# EAGLE board InkTime (EAGLE 9.7.0), part 1 of 2
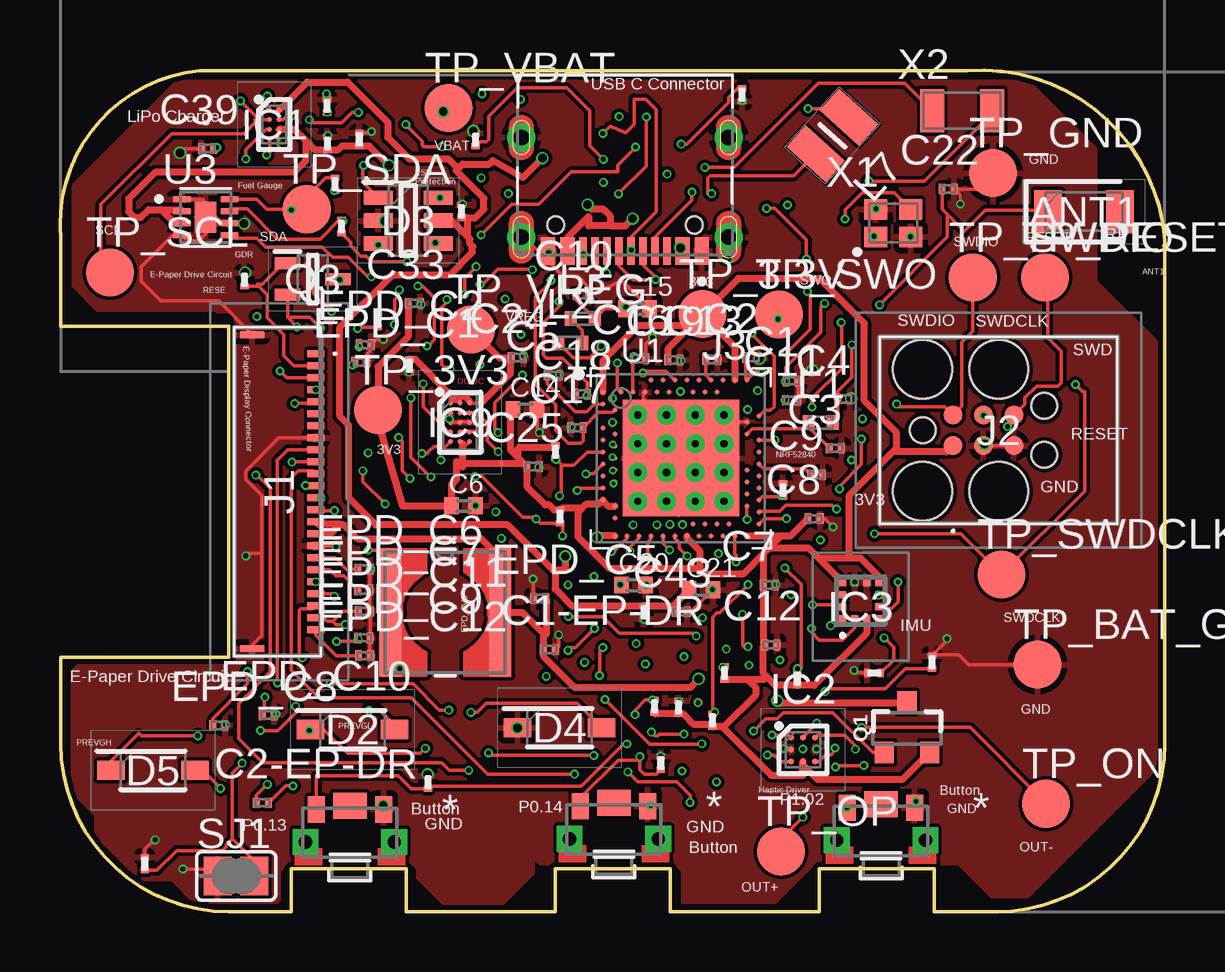
[diagram p0: board, top side]
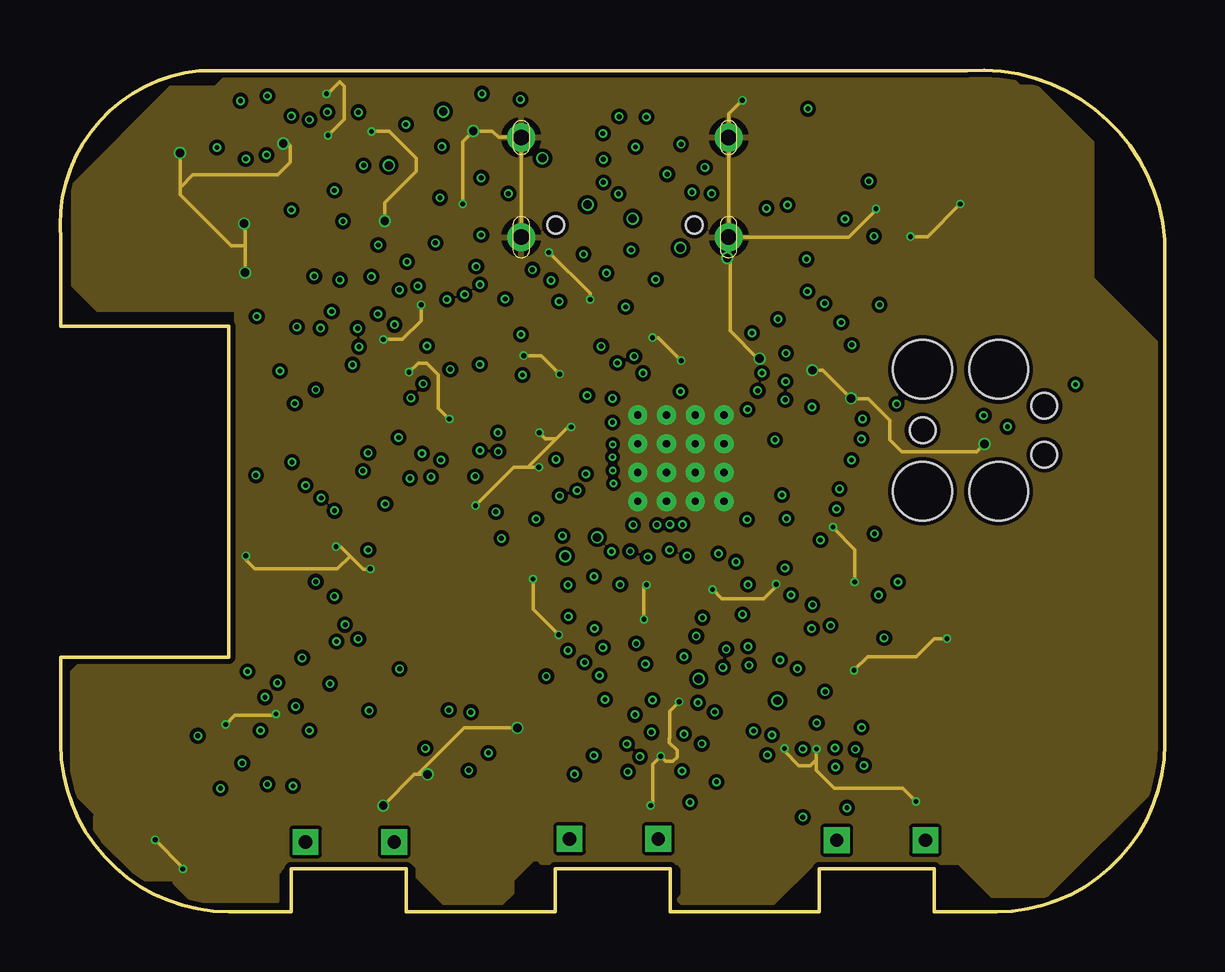
[diagram p1: board, inner layer Route2]
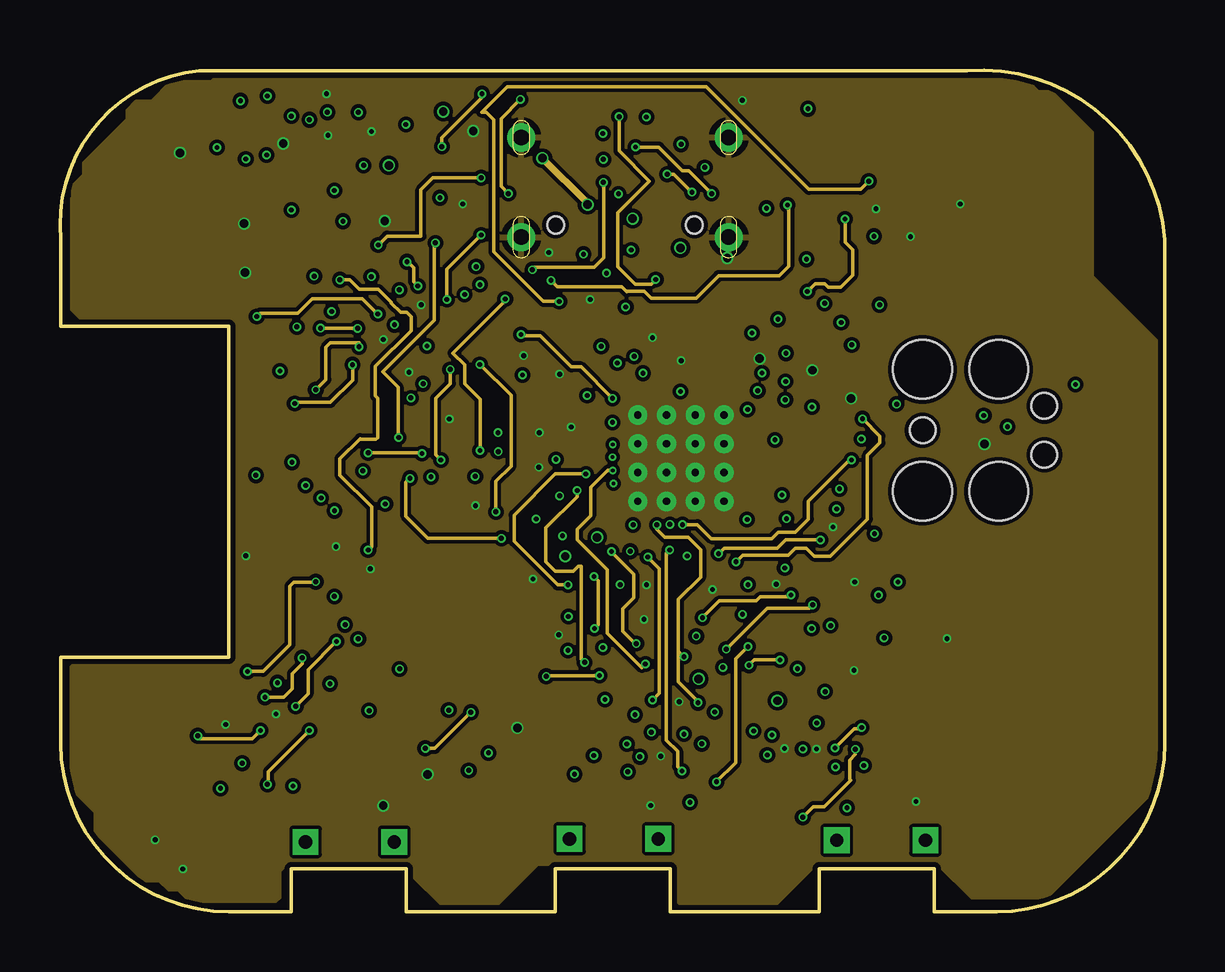
[diagram p2: board, inner layer Route15]
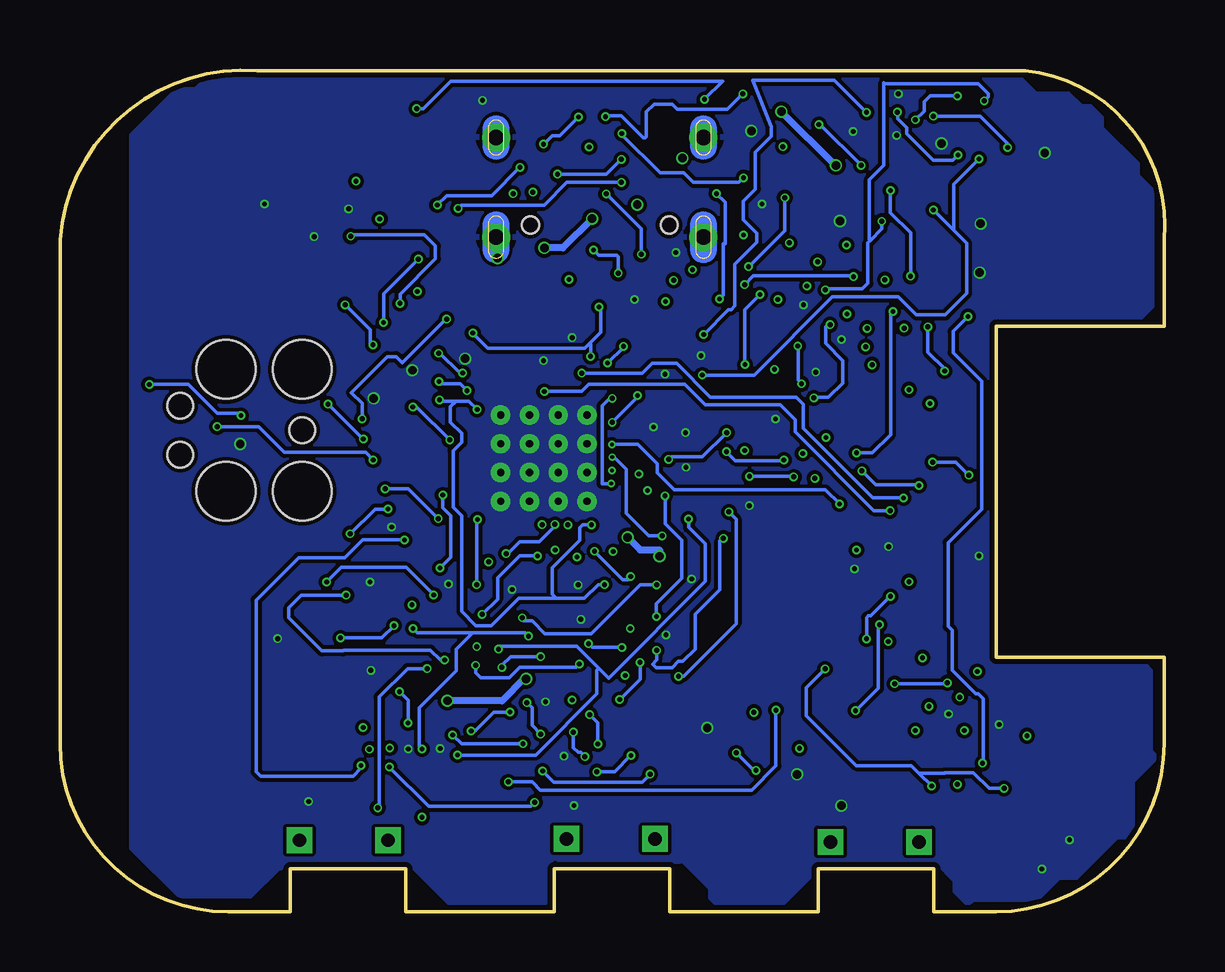
[diagram p3: board, bottom side, seen from below]

Size 46.03 x 35.06 mm. Coordinates in mm from the lower left corner, seen from the top.
Outline: 39.03,0 36.43,0 36.43,1.8 31.63,1.8 31.63,0 25.43,0 25.43,1.8 20.63,1.8 20.63,0 14.43,0 14.43,1.8 9.63,1.8 9.63,0 7.03,0 arc-90 0.03,7 0.03,10.6 7.03,10.6 7.03,24.4 0.03,24.4 0.03,28 arc-90 5.81,35.04 37.81,35.04 arc-90 46.03,28 46.03,7 arc-90 39.03,0
Copper layers (1*16): Top 0.035mm / dielectric 1.6mm / Bottom 0.035mm
Design rules "jlcpcb-2layers.dru *": minimum track width 0.15mm, minimum drill 0.15mm, track to track 0.15mm, track to pad 0.15mm, pad to pad 0.15mm, via to via 0.15mm, smd to smd 0.15mm, copper to edge 0.2mm, drill to drill 6mil, minimum pad ring 10mil, minimum via ring 3mil, stop-mask expansion 4mil, vias tented up to drill 999mm, thermal gap 10mil

## Footprints (pad centres in the part's own frame; a part is rotated, then mirrored left to right if it is on the bottom)
2450AT18B100E_ANTC3216X140N = smd 1.15 x 1.8: 1 -1.5,0; 2 1.5,0
NORDIC_NRF_3_RESC0201_L = smd 0.28 x 0.43: 1 -0.255,0; 2 0.255,0
PERFECT_0402_0402 = smd 0.6 x 0.7: 1 -0.5,0; 2 0.5,0
GRM011R60J152KE01L_1_0201 = smd 0.35 x 0.25: 1 0,0.275; 2 0,-0.275
ESP32_C6_LIBRARY_5_SOD3716X135N = smd 1.15 x 0.8: 1 -1.75,0; 2 1.75,0
ESP32_C6_LIBRARY_3_SOT95P280X145-6N = smd 1.2 x 0.6: 1 -1.25,0.95; 2 -1.25,0; 3 -1.25,-0.95; 4 1.25,-0.95; 5 1.25,0; 6 1.25,0.95
BQ25180YBGR_BGA8C40P2X4_100X155X50 = smd 0.2 x 0.2: A1 -0.2,0.6; A2 0.2,0.6; B1 -0.2,0.2; B2 0.2,0.2; C1 -0.2,-0.2; C2 0.2,-0.2; D1 -0.2,-0.6; D2 0.2,-0.6
DRV2605YZFR_BGA9C50P3X3_144X144X62 = smd 0.25 x 0.25: A1 -0.5,0.5; A2 0,0.5; A3 0.5,0.5; B1 -0.5,0; B2 0,0; B3 0.5,0; C1 -0.5,-0.5; C2 0,-0.5; C3 0.5,-0.5
BMA423_BMA423 = smd 0.3 x 0.35: 1 -0.75,-0.775; 2 -0.25,-0.775; 3 0.25,-0.775; 4 0.75,-0.775; 7 0.75,0.775; 8 0.25,0.775; 9 -0.25,0.775; 10 -0.75,0.775 | smd 0.35 x 0.3: 5 0.775,-0.25; 6 0.775,0.25; 11 -0.775,0.25; 12 -0.775,-0.25
RT6160AWSC_BGA15C40P3X5_140X230X60 = smd 0.216 x 0.216: A1 -0.4,0.8; A2 0,0.8; A3 0.4,0.8; B1 -0.4,0.4; B2 0,0.4; B3 0.4,0.4; C1 -0.4,0; C2 0,0; C3 0.4,0; D1 -0.4,-0.4; D2 0,-0.4; D3 0.4,-0.4; E1 -0.4,-0.8; E2 0,-0.8; E3 0.4,-0.8
503480-2400_5034802400 = smd 0.3 x 0.7: 1 -5.75,1.525; 2 -5.25,1.525; 3 -4.75,1.525; 4 -4.25,1.525; 5 -3.75,1.525; 6 -3.25,1.525; 7 -2.75,1.525; 8 -2.25,1.525; 9 -1.75,1.525; 10 -1.25,1.525; 11 -0.75,1.525; 12 -0.25,1.525; 13 0.25,1.525; 14 0.75,1.525; 15 1.25,1.525; 16 1.75,1.525; 17 2.25,1.525; 18 2.75,1.525; 19 3.25,1.525; 20 3.75,1.525; 21 4.25,1.525; 22 4.75,1.525; 23 5.25,1.525; 24 5.75,1.525 | smd 0.3 x 1: MP1 -6.54,-1.125; MP2 6.54,-1.125
TC2030-IDC_TC2030IDC = smd 0.783 x 0.783: 1 -0.953,-0.635; 2 -0.953,0.635; 3 0.317,-0.635; 4 0.317,0.635; 5 1.588,-0.635; 6 1.588,0.635 | hole 2.451: -2.223,-2.54; -2.223,2.54; 0.952,-2.54; 0.952,2.54 | hole 1.067: -2.223,0; 2.857,-1.016; 2.857,1.016
KH-TYPE-C-16P_KINGHELM_KH-TYPE-C-16P = smd 0.6 x 1.15: A1_B12 -3.2,4.725; A4_B9 -2.4,4.725; A9_B4 2.4,4.725; A12_B1 3.2,4.725 | smd 0.3 x 1.15: A5 -1.25,4.725; A6 -0.25,4.725; A7 0.25,4.725; A8 1.25,4.725; B5 1.75,4.725; B6 0.75,4.725; B7 -0.75,4.725; B8 -1.75,4.725 | drill 0.65 pad 1.05: SH1 -4.32,0; SH2 4.32,0; SH3 -4.32,4.15; SH4 4.32,4.15 | hole 0.7: -2.89,3.65; 2.89,3.65
NORDIC_NRF_2_RESC0402_L = smd 0.5 x 0.6: 1 -0.5,0; 2 0.5,0
ESP32_C6_LIBRARY_2_IND_4828-WE-TPC_WRE = smd 0.9 x 5.3: 1 -2.286,0; 2 2.286,0
MLP2016SR47MT0S1_INDC2016X100N = smd 1.2 x 2.2: 1 -1.028,0; 2 1.028,0
ESP32_C6_LIBRARY_4_ESP32_C6_LIBRARY_4_ESP32_C6_LIBRARY_4_ESP32_C6_LIBRARY_4_ESP32_WROVER_SPARKFUN-DISCRETESEMI_SOT23-3 = smd 0.8 x 0.9: 1 -0.95,-1; 2 0.95,-1; 3 0,1.1
ESP32_C6_LIBRARY_6_SOT65P210X110-3N = smd 1.05 x 0.5: 1 -1.05,0.65; 2 -1.05,-0.65; 3 1.05,0
CPF0201D7K68C1_0201 = smd 0.35 x 0.25: 1 0,0.275; 2 0,-0.275
ESP32_C6_LIBRARY_7_JUMPER_SJ = smd 1.168 x 1.6: 1 -0.762,0; 2 0.762,0
2025-10-22_07-23-44_LIBRARY_SW_EVP-AKE31A_PAN = smd 0.711 x 1.092: 1 -1.4,-0.972; 2 1.4,-0.972 | drill 0.559 pad 0.914 square: 3 -1.848,0.381; 4 1.848,0.381 | smd 1.397 x 1.092: 5 0,-1.124
HECTOR_WATCH_1_TP20R = smd 2 x 2: TP 0,0
NORDIC_NRF_4_AQFN50P700X700X85_HS-74N = smd 4.85 x 4.85: P$74 0,0 | drill 0.3 pad 0.6: P$75 -1.8,1.8; P$76 -0.6,1.8; P$77 0.6,1.8; P$78 1.8,1.8; P$79 -1.8,0.6; P$80 -0.6,0.6; P$81 0.6,0.6; P$82 1.8,0.6; P$83 -1.8,-0.6; P$84 -0.6,-0.6; P$85 0.6,-0.6; P$86 1.8,-0.6; P$87 -1.8,-1.8; P$88 -0.6,-1.8; P$89 0.6,-1.8; P$90 1.8,-1.8 | smd 0.2 x 0.2: P$A8 -1.25,3.25; P$A10 -0.75,3.25; P$A12 -0.25,3.25; P$A14 0.25,3.25; P$A16 0.75,3.25; P$A18 1.25,3.25; P$A20 1.75,3.25; P$A22 2.25,3.25; P$A23 2.75,3.25; P$AA24 3.25,-2.25; P$AB2 -2.75,-2.5; P$AC5 -2,-2.75; P$AC9 -1,-2.75; P$AC11 -0.5,-2.75; P$AC13 0,-2.75; P$AC15 0.5,-2.75; P$AC17 1,-2.75; P$AC19 1.5,-2.75; P$AC21 2,-2.75; P$AC24 3.25,-2.75; P$AD2 -2.75,-3.25; P$AD4 -2.25,-3.25; P$AD6 -1.75,-3.25; P$AD8 -1.25,-3.25; P$AD10 -0.75,-3.25; P$AD12 -0.25,-3.25; P$AD14 0.25,-3.25; P$AD16 0.75,-3.25; P$AD18 1.25,-3.25; P$AD20 1.75,-3.25; P$AD22 2.25,-3.25; P$AD23 2.75,-3.25; P$B1 -3.25,2.75; P$B3 -2.5,2.75; P$B5 -2,2.75; P$B7 -1.5,2.75; P$B9 -1,2.75; P$B11 -0.5,2.75; P$B13 0,2.75; P$B15 0.5,2.75; P$B17 1,2.75; P$B19 1.5,2.75; P$B24 3.25,2.75; P$C1 -3.25,2.25; P$D2 -2.75,2; P$D23 2.75,2; P$E24 3.25,1.75; P$F2 -2.75,1.5; P$F23 2.75,1.5; P$G1 -3.25,1.25; P$H2 -2.75,1; P$H23 2.75,1; P$J1 -3.25,0.75; P$J24 3.25,0.75; P$K2 -2.75,0.5; P$L1 -3.25,0.25; P$L24 3.25,0.25; P$M2 -2.75,0; P$N1 -3.25,-0.25; P$N24 3.25,-0.25; P$P2 -2.75,-0.5; P$P23 2.75,-0.5; P$R1 -3.25,-0.75; P$R24 3.25,-0.75; P$T2 -2.75,-1; P$T23 2.75,-1; P$U1 -3.25,-1.25; P$U24 3.25,-1.25; P$V23 2.75,-1.5; P$W1 -3.25,-1.75; P$W24 3.25,-1.75; P$Y2 -2.75,-2; P$Y23 2.75,-2
ESP32_C6_LIBRARY_SON50P200X200X80-9N = smd 0.76 x 0.27: 1 -0.985,0.75; 2 -0.985,0.25; 3 -0.985,-0.25; 4 -0.985,-0.75; 5 0.985,-0.75; 6 0.985,-0.25; 7 0.985,0.25; 8 0.985,0.75 | smd 0.9 x 1.3: 9 0,0
NORDIC_NRF_BT-XTAL_2016_N = smd 0.95 x 0.85: 1 -0.725,-0.575; 2 0.725,-0.575; 3 0.725,0.575; 4 -0.725,0.575
NORDIC_NRF_1_XTAL_3215_N = smd 1 x 1.8: 1 -1.25,0; 2 1.25,0

## Placement (x,y rotation side)
ANT1  2450AT18B100E_2450AT18B100E  [2450AT18B100E_ANTC3216X140N]  42.67,29.17 0 top
C1  12pF  [NORDIC_NRF_3_RESC0201_L]  30.5,22.12 0 top
C1-EP-DR  10uF  [NORDIC_NRF_3_RESC0201_L]  20.39,10.93 0 top
C2  12pF  [NORDIC_NRF_3_RESC0201_L]  28.82,23.09 0 top
C2-EP-DR  4.7uF/25V  [NORDIC_NRF_3_RESC0201_L]  8.43,4.54 0 top
C3  1pF  [NORDIC_NRF_3_RESC0201_L]  32.31,19.31 0 top
C4  1pF  [NORDIC_NRF_3_RESC0201_L]  32.66,21.36 0 top
C5  100nF  [NORDIC_NRF_3_RESC0201_L]  20.56,22.35 0 top
C6  4.7uF  [PERFECT_0402_0402]  16.82,16.91 0 top
C7  100nF  [NORDIC_NRF_3_RESC0201_L]  29.56,13.61 0 top
C8  100nF  [NORDIC_NRF_3_RESC0201_L]  31.42,16.38 0 top
C9  820pF  [NORDIC_NRF_3_RESC0201_L]  31.52,18.21 0 top
C10  N.C.  [NORDIC_NRF_3_RESC0201_L]  21.76,25.71 0 top
C11  100pF  [NORDIC_NRF_3_RESC0201_L]  30.48,21.31 0 top
C12  100nF  [NORDIC_NRF_3_RESC0201_L]  29.62,11.12 0 top
C13  N.C.  [NORDIC_NRF_3_RESC0201_L]  27.16,23.01 0 top
C14  4.7uF  [PERFECT_0402_0402]  19.38,20.93 0 top
C15  1.0uF  [PERFECT_0402_0402]  24.06,25.13 0 top
C16  47nF  [NORDIC_NRF_3_RESC0201_L]  24.15,23.05 0 top
C17  12pF  [NORDIC_NRF_3_RESC0201_L]  21.54,20.17 0 top
C18  12pF  [NORDIC_NRF_3_RESC0201_L]  21.72,21.57 0 top
C19  100nF  [NORDIC_NRF_3_RESC0201_L]  25.58,22.99 0 top
C20  4.7uF  [PERFECT_0402_0402]  23.9,13.61 0 top
C21  4.7uF  [PERFECT_0402_0402]  26.71,13.41 0 top
C22  N.C.  [NORDIC_NRF_3_RESC0201_L]  37.01,30.11 0 top
C23  0.1uF  [GRM011R60J152KE01L_1_0201]  14.56,22.75 0 top
C24  10uF  [NORDIC_NRF_3_RESC0201_L]  19.06,23.09 0 top
C25  22uF  [NORDIC_NRF_3_RESC0201_L]  19.71,18.55 0 top
C27  0.1uF  [GRM011R60J152KE01L_1_0201]  12.47,32.18 0 top
C29  1uF  [GRM011R60J152KE01L_1_0201]  30.12,17.57 0 top
C30  1uF  [GRM011R60J152KE01L_1_0201]  15.33,5.4 0 top
C31  1uF  [GRM011R60J152KE01L_1_0201]  25.03,6.2 0 top
C32  1uF  [GRM011R60J152KE01L_1_0201]  36.33,10.4 0 top
C33  22uF  [NORDIC_NRF_3_RESC0201_L]  14.76,25.35 0 top
C34  0.1uF  [GRM011R60J152KE01L_1_0201]  25.77,8.52 0 top
C37  10uF  [GRM011R60J152KE01L_1_0201]  11.14,32.01 0 top
C38  1uF  [GRM011R60J152KE01L_1_0201]  16.73,29.19 0 top
C39  10uF  [NORDIC_NRF_3_RESC0201_L]  6.15,31.8 0 top
C42  0.1uF  [GRM011R60J152KE01L_1_0201]  24.33,12.48 0 top
C43  4.7uF  [NORDIC_NRF_3_RESC0201_L]  25.88,12.5 0 top
D2  ESP32_C6_LIBRARY_5_MBR0530  [ESP32_C6_LIBRARY_5_SOD3716X135N]  12.19,7.59 0 top
D3  ESP32_C6_LIBRARY_3_USBLC6-2SC6Y  [ESP32_C6_LIBRARY_3_SOT95P280X145-6N]  14.51,28.8 0 top
D4  ESP32_C6_LIBRARY_5_MBR0530  [ESP32_C6_LIBRARY_5_SOD3716X135N]  20.82,7.67 0 top
D5  ESP32_C6_LIBRARY_5_MBR0530  [ESP32_C6_LIBRARY_5_SOD3716X135N]  3.87,5.89 0 top
EPD_C1  1uF/50V  [NORDIC_NRF_3_RESC0201_L]  12.54,22.9 0 top
EPD_C2  1uF/50V  [NORDIC_NRF_3_RESC0201_L]  12.71,23.63 0 top
EPD_C5  0.1uF/50V  [NORDIC_NRF_3_RESC0201_L]  19.98,13.05 0 top
EPD_C6  1uF/50V  [NORDIC_NRF_3_RESC0201_L]  12.67,14.28 0 top
EPD_C7  1uF/50V  [NORDIC_NRF_3_RESC0201_L]  12.66,13.4 0 top
EPD_C8  1uF/50V  [NORDIC_NRF_3_RESC0201_L]  6.62,7.76 0 top
EPD_C9  1uF/50V  [NORDIC_NRF_3_RESC0201_L]  12.66,11.41 0 top
EPD_C10  1uF/50V  [NORDIC_NRF_3_RESC0201_L]  8.68,8.2 0 top
EPD_C11  1uF/50V  [NORDIC_NRF_3_RESC0201_L]  12.68,12.52 0 top
EPD_C12  1uF/50V  [NORDIC_NRF_3_RESC0201_L]  12.69,10.67 0 top
IC1  BQ25180YBGR_BQ25180YBGRBQ25180YBGR  [BQ25180YBGR_BGA8C40P2X4_100X155X50]  8.93,32.8 0 top
IC2  DRV2605YZFR_DRV2605YZFR  [DRV2605YZFR_BGA9C50P3X3_144X144X62]  30.96,6.75 0 top
IC3  BMA423_BMA423  [BMA423_BMA423]  33.36,12.96 0 top
IC9  RT6160AWSC_RT6160AWSC  [RT6160AWSC_BGA15C40P3X5_140X230X60]  16.67,20.39 0 top
J1  503480-2400_503480-2400  [503480-2400_5034802400]  9.13,17.5 270 top
J2  TC2030-IDC_TC2030-IDC  [TC2030-IDC_TC2030IDC]  38.16,20.06 0 top
J3  KH-TYPE-C-16P_KH-TYPE-C-16P  [KH-TYPE-C-16P_KINGHELM_KH-TYPE-C-16P]  23.54,32.26 180 top
L1  3.9nH  [NORDIC_NRF_2_RESC0402_L]  31.7,20.38 0 top
L2  10uH  [NORDIC_NRF_2_RESC0402_L]  21.26,23.7 0 top
L3  15uH  [NORDIC_NRF_2_RESC0402_L]  21.78,24.71 0 top
L5  68uH  [ESP32_C6_LIBRARY_2_IND_4828-WE-TPC_WRE]  16.05,12.47 0 top
L7  MLP2016SR47MT0S1_FTC252012SR47MBCA  [MLP2016SR47MT0S1_INDC2016X100N]  32.18,32.34 47.7 top
Q1  20V/4.2A/52mΩ/1.4W  [ESP32_C6_LIBRARY_4_ESP32_C6_LIBRARY_4_ESP32_C6_LIBRARY_4_ESP32_C6_LIBRARY_4_ESP32_WROVER_SPARKFUN-DISCRETESEMI_SOT23-3]  35.29,7.64 0 top
Q3  ESP32_C6_LIBRARY_6_SI1308EDL-T1-GE3  [ESP32_C6_LIBRARY_6_SOT65P210X110-3N]  10.53,26.36 0 top
R1_EP_DR  0.47  [CPF0201D7K68C1_0201]  13.24,24.63 0 top
R1_EP_DR1  0.47  [CPF0201D7K68C1_0201]  27.19,7.98 0 top
R1_USB  5K1  [CPF0201D7K68C1_0201]  17.31,32.17 0 top
R2  0  [CPF0201D7K68C1_0201]  11.46,30.31 0 top
R2_EP_DR  10K  [CPF0201D7K68C1_0201]  7.68,26.34 0 top
R2_USB  5K1  [CPF0201D7K68C1_0201]  28.42,34.04 0 top
R3  0  [CPF0201D7K68C1_0201]  33.92,9.95 90 top
R4  0  [CPF0201D7K68C1_0201]  11.73,28.55 0 top
R5  10K  [CPF0201D7K68C1_0201]  24.77,8.56 0 top
R7  10K  [CPF0201D7K68C1_0201]  30.72,9.71 0 top
R8  10K  [CPF0201D7K68C1_0201]  27.68,9.95 0 top
R9  10K  [CPF0201D7K68C1_0201]  11.13,33.57 0 top
R17  3K3  [CPF0201D7K68C1_0201]  20.83,16.47 0 top
R18  3K3  [CPF0201D7K68C1_0201]  20.64,19.16 0 top
R_TYPE_SEL  2.2  [CPF0201D7K68C1_0201]  3.53,2 0 top
SJ1  [ESP32_C6_LIBRARY_7_JUMPER_SJ]  7.34,1.49 0 top
SW_DN  2025-10-22_07-23-44_LIBRARY_EVP-AKE31ASW_EVP-AKE31A_PAN  [2025-10-22_07-23-44_LIBRARY_SW_EVP-AKE31A_PAN]  34.21,3.36 180 top
SW_ENT  2025-10-22_07-23-44_LIBRARY_EVP-AKE31ASW_EVP-AKE31A_PAN  [2025-10-22_07-23-44_LIBRARY_SW_EVP-AKE31A_PAN]  23.08,3.42 180 top
SW_UP  2025-10-22_07-23-44_LIBRARY_EVP-AKE31ASW_EVP-AKE31A_PAN  [2025-10-22_07-23-44_LIBRARY_SW_EVP-AKE31A_PAN]  12.08,3.29 180 top
TP_3.3V  HECTOR_WATCH_1_TPTP20R  [HECTOR_WATCH_1_TP20R]  26.77,24.9 0 top
TP_3V3  HECTOR_WATCH_1_TPTP20R  [HECTOR_WATCH_1_TP20R]  13.25,20.9 0 top
TP_BAT_GND  HECTOR_WATCH_1_TPTP20R  [HECTOR_WATCH_1_TP20R]  40.73,10.3 0 top
TP_GND  HECTOR_WATCH_1_TPTP20R  [HECTOR_WATCH_1_TP20R]  38.88,30.78 0 top
TP_ON  HECTOR_WATCH_1_TPTP20R  [HECTOR_WATCH_1_TP20R]  41.08,4.5 0 top
TP_OP  HECTOR_WATCH_1_TPTP20R  [HECTOR_WATCH_1_TP20R]  30.04,2.51 0 top
TP_RESET  HECTOR_WATCH_1_TPTP20R  [HECTOR_WATCH_1_TP20R]  41.05,26.43 0 top
TP_SCL  HECTOR_WATCH_1_TPTP20R  [HECTOR_WATCH_1_TP20R]  2.08,26.64 0 top
TP_SDA  HECTOR_WATCH_1_TPTP20R  [HECTOR_WATCH_1_TP20R]  10.28,29.27 0 top
TP_SWDCLK  HECTOR_WATCH_1_TPTP20R  [HECTOR_WATCH_1_TP20R]  39.22,14.06 0 top
TP_SWDIO  HECTOR_WATCH_1_TPTP20R  [HECTOR_WATCH_1_TP20R]  38.03,26.42 0 top
TP_SWO  HECTOR_WATCH_1_TPTP20R  [HECTOR_WATCH_1_TP20R]  29.96,24.89 0 top
TP_VBAT  HECTOR_WATCH_1_TPTP20R  [HECTOR_WATCH_1_TP20R]  16.19,33.49 0 top
TP_VREG  HECTOR_WATCH_1_TPTP20R  [HECTOR_WATCH_1_TP20R]  17.13,24.26 0 top
U1  NORDIC_NRF_4_NRF52840_QF  [NORDIC_NRF_4_AQFN50P700X700X85_HS-74N]  25.87,18.9 0 top
U3  ESP32_C6_LIBRARY_MAX17048G+T10  [ESP32_C6_LIBRARY_SON50P200X200X80-9N]  6.07,28.94 0 top
X1  32MHz  [NORDIC_NRF_BT-XTAL_2016_N]  34.72,28.69 0 top
X2  32.768kHz  [NORDIC_NRF_1_XTAL_3215_N]  37.59,33.38 0 top

## Library data of the parts
ANT1 = InkTime_v5; ARROW_PART_NUMBER: 2450AT18B100E; ARROW_PRICE-STOCK: https://www.arrow.com/en/products/2450at18b100e/johanson-dielectrics?utm_currency=USD&region=nac; DESCRIPTION: Antennas 2.45GHz ANTENNA; HEIGHT: 1.4mm; MANUFACTURER_NAME: JOHANSON TECHNOLOGY; MANUFACTURER_PART_NUMBER: 2450AT18B100E; MOUSER_PART_NUMBER: 609-2450AT18B100E; MOUSER_PRICE-STOCK: https://www.mouser.co.uk/ProductDetail/Johanson-Technology/2450AT18B100E?qs=yCnrNFeXz%252Bh5MFsFIXGZGA%3D%3D
C1 C1-EP-DR C2 C2-EP-DR C3-C25 C27 C29-C34 C37-C39 C42 C43 EPD_C1 EPD_C2 EPD_C5-EPD_C12 IC1 L1-L3 R1_EP_DR R1_EP_DR1 R1_USB R2 R2_EP_DR R2_USB R3-R5 R7-R9 R17 R18 R_TYPE_SEL SJ1 TP_3.3V TP_3V3 TP_BAT_GND TP_GND TP_ON TP_OP TP_RESET TP_SCL TP_SDA TP_SWDCLK TP_SWDIO TP_SWO TP_VBAT TP_VREG U1 X1 X2 = InkTime_v5
D2 D4 D5 = InkTime_v5; AVAILABILITY: In Stock; CHECK_PRICES: https://www.snapeda.com/parts/MBR0530/Onsemi/view-part/?ref=eda; DESCRIPTION: Diode Schottky 30 V 500mA Surface Mount SOD-123; MF: ON Semiconductor; MP: MBR0530; PACKAGE: SOD-123-2 ON Semiconductor; PRICE: None; PURCHASE-URL: https://www.snapeda.com/api/url_track_click_mouser/?unipart_id=179458&manufacturer=ON Semiconductor&part_name=MBR0530&search_term=None; SNAPEDA_LINK: https://www.snapeda.com/parts/MBR0530/Onsemi/view-part/?ref=snap
D3 = InkTime_v5; AVAILABILITY: In Stock; CHECK_PRICES: https://www.snapeda.com/parts/USBLC6-2SC6Y/STMicroelectronics/view-part/?ref=eda; DESCRIPTION: 17V Clamp 5A (8/20µs) Ipp Tvs Diode Surface Mount SOT-23-6; MF: STMicroelectronics; MP: USBLC6-2SC6Y; PACKAGE: SOT-23-6 STMicroelectronics; PRICE: None; SNAPEDA_LINK: https://www.snapeda.com/parts/USBLC6-2SC6Y/STMicroelectronics/view-part/?ref=snap
IC2 = InkTime_v5; ARROW_PART_NUMBER: DRV2605YZFR; ARROW_PRICE-STOCK: https://www.arrow.com/en/products/drv2605yzfr/texas-instruments?region=nac; DESCRIPTION: Haptic Driver for ERM/LRA with Built-In Library and Smart Loop Architecture; HEIGHT: 0.625mm; MANUFACTURER_NAME: Texas Instruments; MANUFACTURER_PART_NUMBER: DRV2605YZFR
IC3 = InkTime_v5; ARROW_PART_NUMBER: BMA423; ARROW_PRICE-STOCK: https://www.arrow.com/en/products/bma423/bosch; DESCRIPTION: Accelerometers Triaxial low-g 12bit Acceleration Sensor; HEIGHT: 1mm; MANUFACTURER_NAME: BOSCH; MANUFACTURER_PART_NUMBER: BMA423; MOUSER_PART_NUMBER: 262-BMA423; MOUSER_PRICE-STOCK: https://www.mouser.co.uk/ProductDetail/Bosch-Sensortec/BMA423?qs=HXFqYaX1Q2xC%252BSgeGoX3mg%3D%3D
IC9 = InkTime_v5; DESCRIPTION: Buck-Boost Regulator Positive Output Step-Up/Step-Down I2C DC-DC Controller IC 15-WL-CSP (BSC) (1.4x2.3); HEIGHT: 0.6mm; MANUFACTURER_NAME: RICHTEK; MANUFACTURER_PART_NUMBER: RT6160AWSC; MOUSER_PART_NUMBER: 835-RT6160AWSC; MOUSER_PRICE-STOCK: https://www.mouser.co.uk/ProductDetail/Richtek/RT6160AWSC?qs=amGC7iS6iy%2FLd9PSoixZXQ%3D%3D
J1 = InkTime_v5; DESCRIPTION: FFC & FPC Connectors 0.5mm FPC RA SMT Dual Contact 24Ckt; HEIGHT: 1.87mm; MANUFACTURER_NAME: Molex; MANUFACTURER_PART_NUMBER: 503480-2400; MOUSER_PART_NUMBER: 538-503480-2400; MOUSER_PRICE-STOCK: https://www.mouser.co.uk/ProductDetail/Molex/503480-2400?qs=OAhjpuo3Vu7efIoxFh9AOw%3D%3D
J2 = InkTime_v5; DESCRIPTION: CABLE ADAPTER 6 POS; HEIGHT: 19mm; MANUFACTURER_NAME: Tag Connect; MANUFACTURER_PART_NUMBER: TC2030-IDC
J3 = InkTime_v5; AVAILABILITY: Not in stock; CHECK_PRICES: https://www.snapeda.com/parts/KH-TYPE-C-16P/Kinghelm/view-part/?ref=eda; MF: kinghelm; MP: KH-TYPE-C-16P; PACKAGE: None; PRICE: None; SNAPEDA_LINK: https://www.snapeda.com/parts/KH-TYPE-C-16P/Kinghelm/view-part/?ref=snap
L5 = InkTime_v5; COPYRIGHT: Copyright (C) 2024 Ultra Librarian. All rights reserved.; MANUFACTURER_PART_NUMBER: 744043680; MFR_NAME: Wurth Electronics
L7 = InkTime_v5; DESCRIPTION: SMD / SMT Inductors (Coils), L=0.47?H, L x W x T :; HEIGHT: 1mm; JLCPCB: https://jlcpcb.com/partdetail/6763488-FTC252012SR47MBCA/C5832368; MANUFACTURER_NAME: TDK; MANUFACTURER_PART_NUMBER: FTC252012SR47MBCA
Q1 = InkTime_v5; PROD_ID: TRAN-14388
Q3 = InkTime_v5; AVAILABILITY: In Stock; CHECK_PRICES: https://www.snapeda.com/parts/SI1308EDL-T1-GE3/Vishay+Siliconix/view-part/?ref=eda; DESCRIPTION: Si1308EDL-T1-GE3 N-channel MOSFET Transistor, 1.5 A, 30 V, 3-Pin SC-70 | Siliconix / Vishay SI1308EDL-T1-GE3; MF: Vishay Siliconix; MP: SI1308EDL-T1-GE3; PACKAGE: SOT-323 Vishay Semiconductor; PRICE: None; PURCHASE-URL: https://www.snapeda.com/api/url_track_click_mouser/?unipart_id=274603&manufacturer=Vishay Siliconix&part_name=SI1308EDL-T1-GE3&search_term=None; SNAPEDA_LINK: https://www.snapeda.com/parts/SI1308EDL-T1-GE3/Vishay+Siliconix/view-part/?ref=snap
SW_DN SW_ENT SW_UP = InkTime_v5; COPYRIGHT: Copyright (C) 2025 Ultra Librarian. All rights reserved.; DIGI-KEY_PART_NUMBER_1: P123437TR-ND; DIGI-KEY_PART_NUMBER_2: P123437CT-ND; DIGI-KEY_PART_NUMBER_3: P123437DKR-ND; MANUFACTURER_NAME: Panasonic; MANUFACTURER_PART_NUMBER: EVP-AKE31A
U3 = InkTime_v5; AVAILABILITY: In Stock; CHECK_PRICES: https://www.snapeda.com/parts/MAX17048G+T10/Analog+Devices/view-part/?ref=eda; DESCRIPTION: 3µA 1-Cell/2-Cell Fuel Gauge with ModelGauge; MF: Analog Devices; MP: MAX17048G+T10; PACKAGE: TDFN-8 Maxim; PRICE: None; PURCHASE-URL: https://www.snapeda.com/api/url_track_click_mouser/?unipart_id=329239&manufacturer=Analog Devices&part_name=MAX17048G+T10&search_term=None; SNAPEDA_LINK: https://www.snapeda.com/parts/MAX17048G+T10/Analog+Devices/view-part/?ref=snap

## Nets
3V3: C6.1 C7.1 C8.1 C12.1 C14.1 C19.1 C25.1 C33.1 C34.2 IC2.C2 IC3.3 IC3.7 IC3.10 IC9.E2 IC9.E3 J2.1 Q1.2 R1_EP_DR1.2 R5.2 R7.2 R8.2 R17.1 R18.1 TP_3.3V.TP TP_3V3.TP U1.P$A22 U1.P$AD14 U1.P$AD23 U1.P$B1 U1.P$W1 U1.P$Y2
ALERT [New Class]: U1.P$J24 U3.5
D+ [New Class]: D3.4 U1.P$AD6
D- [New Class]: D3.6 U1.P$AD4
DEC1 [New Class]: C5.1 U1.P$C1
DEC3 [New Class]: C11.1 C20.1 U1.P$AC5 U1.P$D23
DEC4_6 [New Class]: C10.1 C15.1 C16.1 L3.2 U1.P$B5 U1.P$E24
DN [New Class]: D3.1 J3.A7 J3.B7
DP [New Class]: D3.3 J3.A6 J3.B6
EPD_3V3: C1-EP-DR.1 EPD_C5.2 J1.15 J1.16 L5.2 Q1.3
EPD_BUSY [New Class]: J1.9 U1.P$AD12
EPD_CS [New Class]: J1.12 U1.P$K2
EPD_DC [New Class]: J1.11 U1.P$AD10
EPD_RST [New Class]: J1.10 U1.P$AC11
GDR [New Class]: J1.2 Q3.1 R2_EP_DR.2
GND [New Class]: C1-EP-DR.2 C1.2 C2.2 C3.2 C4.2 C5.2 C6.2 C7.2 C8.2 C9.2 C10.2 C11.2 C12.2 C13.2 C14.2 C15.2 C16.2 C17.1 C18.1 C19.2 C20.2 C21.2 C22.2 C23.2 C24.2 C25.2 C27.1 C29.1 C30.1 C31.1 C32.1 C33.2 C34.1 C37.1 C38.1 C39.1 C42.2 C43.2 D3.2 D4.1 EPD_C1.2 EPD_C2.2 EPD_C5.1 EPD_C6.2 EPD_C7.2 EPD_C8.2 EPD_C9.2 EPD_C10.2 EPD_C11.2 EPD_C12.2 IC1.D2 IC2.B1 IC2.B3 IC3.8 IC3.9 IC9.B1 IC9.C1 IC9.C2 IC9.C3 J1.8 J1.17 J1.MP1 J1.MP2 J2.3 J2.5 J3.A1_B12 J3.A12_B1 J3.SH1 J3.SH2 J3.SH3 J3.SH4 R1_USB.1 R2_EP_DR.1 R2_USB.2 R3.1 R9.1 R_TYPE_SEL.1 SJ1.1 SW_DN.1 SW_ENT.1 SW_UP.1 TP_BAT_GND.TP TP_GND.TP U1.P$74 U1.P$75 U1.P$76 U1.P$77 U1.P$78 U1.P$79 U1.P$80 U1.P$81 U1.P$82 U1.P$83 U1.P$84 U1.P$85 U1.P$86 U1.P$87 U1.P$88 U1.P$89 U1.P$90 U1.P$B7 U1.P$F23 U3.1 U3.4 U3.6 U3.9 X1.2 X1.4
HAPTIC_EN [New Class]: IC2.A1 U1.P$U1
IMU_INT1 [New Class]: IC3.5 U1.P$N1
IMU_INT2 [New Class]: IC3.6 U1.P$P2
LX1 [New Class]: IC9.B2 IC9.B3 L7.1
LX2 [New Class]: IC9.D2 IC9.D3 L7.2
MOSI [New Class]: J1.14 U1.P$B13
N$1 [New Class]: C9.1 U1.P$N24
N$2 [New Class]: C3.1 L1.1 U1.P$H23
N$3 [New Class]: L2.2 L3.1
N$4 [New Class]: C13.1 U1.P$A18
N$5 [New Class]: L2.1 U1.P$B3
N$6 [New Class]: C1.1 U1.P$B24 X1.1
N$7 [New Class]: C2.1 U1.P$A23 X1.3
N$8 [New Class]: C39.2 IC1.B2
N$9 [New Class]: IC1.D1 R9.2
N$11 [New Class]: IC9.D1 R4.2
N$12 [New Class]: IC9.E1 R2.2
N$13 [New Class]: IC3.1 R3.2
N$14 [New Class]: C2-EP-DR.1 D2.1 D4.2
N$15 [New Class]: C2-EP-DR.2 D5.2 L5.1 Q3.3
N$16 [New Class]: R1_EP_DR.1 R_TYPE_SEL.2 SJ1.2
N$17 [New Class]: EPD_C2.1 J1.4
N$18 [New Class]: EPD_C1.1 J1.5
N$19 [New Class]: EPD_C6.1 J1.18
N$20 [New Class]: EPD_C7.1 J1.19
N$21 [New Class]: EPD_C8.1 J1.20
N$22 [New Class]: J3.A5 R1_USB.2
N$23 [New Class]: EPD_C10.1 J1.22
N$24 [New Class]: J3.B5 R2_USB.1
N$25 [New Class]: EPD_C12.1 J1.24
N$26 [New Class]: C32.2 IC2.A2
OUT+ [New Class]: IC2.A3 TP_OP.TP
OUT- [New Class]: IC2.C3 TP_ON.TP
P0.00 [New Class]: C17.2 U1.P$D2 X2.1
P0.01 [New Class]: C18.2 U1.P$F2 X2.2
P0.04 [New Class]: U1.P$J1
P0.09 [New Class]: U1.P$L24
P0.13 [New Class]: C30.2 R5.1 SW_UP.2 U1.P$AD8
P0.14 [New Class]: C31.2 R8.1 SW_ENT.2 U1.P$AC9
P0.19 [New Class]: U1.P$AC15
P0.20 [New Class]: U1.P$AD16
P0.21 [New Class]: U1.P$AC17
P0.22 [New Class]: U1.P$AD18
P0.23 [New Class]: U1.P$AC19
P0.24 [New Class]: U1.P$AD20
P0.25 [New Class]: U1.P$AC21
P0.26 [New Class]: U1.P$G1
P0.27 [New Class]: U1.P$H2
P0.28 [New Class]: U1.P$B11
P0.29 [New Class]: U1.P$A10
P0.30 [New Class]: U1.P$B9
P0.31 [New Class]: U1.P$A8
P1.01 [New Class]: Q1.1 R1_EP_DR1.1 U1.P$Y23
P1.02 [New Class]: C29.2 R7.1 SW_DN.2 U1.P$W24
P1.03 [New Class]: U1.P$V23
P1.04 [New Class]: U1.P$U24
P1.05 [New Class]: U1.P$T23
P1.06 [New Class]: U1.P$R24
P1.07 [New Class]: U1.P$P23
P1.09 [New Class]: U1.P$R1
P1.10 [New Class]: U1.P$A20
P1.11 [New Class]: U1.P$B19
P1.12 [New Class]: U1.P$B17
P1.13 [New Class]: U1.P$A16
P1.14 [New Class]: U1.P$B15
P1.15 [New Class]: U1.P$A14
PMIC_INT [New Class]: IC1.A1 U1.P$T2
PREVGH [New Class]: D5.1 EPD_C9.1 J1.21
PREVGL [New Class]: D2.2 EPD_C11.1 J1.23
RESE [New Class]: J1.3 Q3.2 R1_EP_DR.2
RESET [New Class]: J2.6 TP_RESET.TP U1.P$AC13
RF [New Class]: ANT1.1 C4.1 C22.1 L1.2
SCK [New Class]: J1.13 U1.P$A12
SCL [New Class]: IC1.B1 IC2.C1 IC3.12 R4.1 R17.2 TP_SCL.TP U1.P$M2 U3.7
SDA [New Class]: IC1.C1 IC2.B2 IC3.2 R2.1 R18.2 TP_SDA.TP U1.P$L1 U3.8
SWDCLK [New Class]: J2.4 TP_SWDCLK.TP U1.P$AA24
SWDIO [New Class]: J2.2 TP_SWDIO.TP U1.P$AC24
SWO [New Class]: TP_SWO.TP U1.P$AD22
VBAT: C27.2 C37.2 IC1.C2 TP_VBAT.TP U3.2 U3.3
VBUS: C21.1 C38.2 C42.1 C43.1 D3.5 IC1.A2 J3.A4_B9 J3.A9_B4 U1.P$AD2
VREG: C23.1 C24.1 IC9.A1 IC9.A2 IC9.A3 TP_VREG.TP